# EAGLE board Pro mini (EAGLE 9.5.2)

Size 160 x 100 mm. Coordinates in mm from the lower left corner, seen from the top.
Outline: 0,0 160,0 160,100 0,100 0,0
Copper layers (1*16): Top 0.035mm / dielectric 1.5mm / Bottom 0.035mm
Design rules "default": minimum track width 6mil, minimum drill 0.35mm, track to track 6mil, track to pad 6mil, pad to pad 6mil, via to via 6mil, smd to smd 6mil, copper to edge 40mil, drill to drill 6mil, minimum pad ring 10mil, minimum via ring 8mil, stop-mask expansion 4mil, vias tented up to drill 0mil, thermal gap 10mil

## Footprints (pad centres in the part's own frame; a part is rotated, then mirrored left to right if it is on the bottom)
SML0805 = smd 1.2 x 1.2: A 1.05,0; C -1.05,0
R0805 = smd 1.3 x 1.5: 1 -0.95,0; 2 0.95,0
TQFP-32 = smd 1.5 x 0.57: 1 -4.13,2.8; 2 -4.13,2; 3 -4.13,1.2; 4 -4.13,0.4; 5 -4.13,-0.4; 6 -4.13,-1.2; 7 -4.13,-2; 8 -4.13,-2.8; 17 4.13,-2.8; 18 4.13,-2; 19 4.13,-1.2; 20 4.13,-0.4; 21 4.13,0.4; 22 4.13,1.2; 23 4.13,2; 24 4.13,2.8 | smd 0.57 x 1.5: 9 -2.8,-4.13; 10 -2,-4.13; 11 -1.2,-4.13; 12 -0.4,-4.13; 13 0.4,-4.13; 14 1.2,-4.13; 15 2,-4.13; 16 2.8,-4.13; 25 2.8,4.13; 26 2,4.13; 27 1.2,4.13; 28 0.4,4.13; 29 -0.4,4.13; 30 -1.2,4.13; 31 -2,4.13; 32 -2.8,4.13
SOT23-5 = smd 0.69 x 0.99: 1 -0.95,-1.29; 2 0,-1.29; 3 0.95,-1.29; 4 0.95,1.3; 5 -0.95,1.3
CAPC2012X110 = smd 1.165 x 1.465: 1 -0.875,0; 2 0.875,0

## Placement (x,y rotation side)
LED1  PWR  [SML0805]  10.16,20.32 0 top
R1  [R0805]  10.16,24.13 0 top
U1  ATMEGA328P-AU  [TQFP-32]  24.13,10.16 0 top
U$1  MIC5205SOT23-5  [SOT23-5]  17.78,20.32 0 top
U$2  10µF  [CAPC2012X110]  22.86,20.32 90 top
U$3  10µF  [CAPC2012X110]  20.32,26.67 0 top
U$4  0.1µF  [CAPC2012X110]  15.24,16.51 0 top
U$5  0.1µF  [CAPC2012X110]  5.08,-3.81 0 top  (outside the outline)
U$6  0.1µF  [CAPC2012X110]  3.81,-11.43 0 top  (outside the outline)
U$7  0.1µF  [CAPC2012X110]  3.81,-19.05 0 top  (outside the outline)

## Library data of the parts
LED1 = led
R1 = rcl; SPICEPREFIX: R
U1 = Microcontroller; CREATED_BY: PCBLayout.com; DIGIKEY_PART_NUMBER: ATMEGA328P-AU-ND; MANUFACTURER: Microchip Technology; MPN: ATMEGA328P-AU; PACKAGE: TQFP-32
U$1 = MIC520x
U$2-U$7 = Capacitor; CATEGORY: Capacitor

## Nets
+5V: R1.2 U1.4 U1.6 U1.18 U$1.5 U$3.1 U$4.1 U$5.1 U$6.1
GND: LED1.C U1.3 U1.5 U1.21 U$1.2 U$2.2 U$3.2 U$4.2 U$5.2 U$6.2 U$7.2
N$1: U1.20 U$7.1
N$3: LED1.A R1.1
RAW: U$1.1 U$1.3 U$2.1

## Tracks (layer width: path | path; a pad name or v marks a point on that pad's centre or on a via)
+5V  (8 unrouted)
GND  (10 unrouted)
N$1  (1 unrouted)
N$3  (1 unrouted)
RAW  (2 unrouted)